# EAGLE board rev1 (EAGLE 6.5.0)
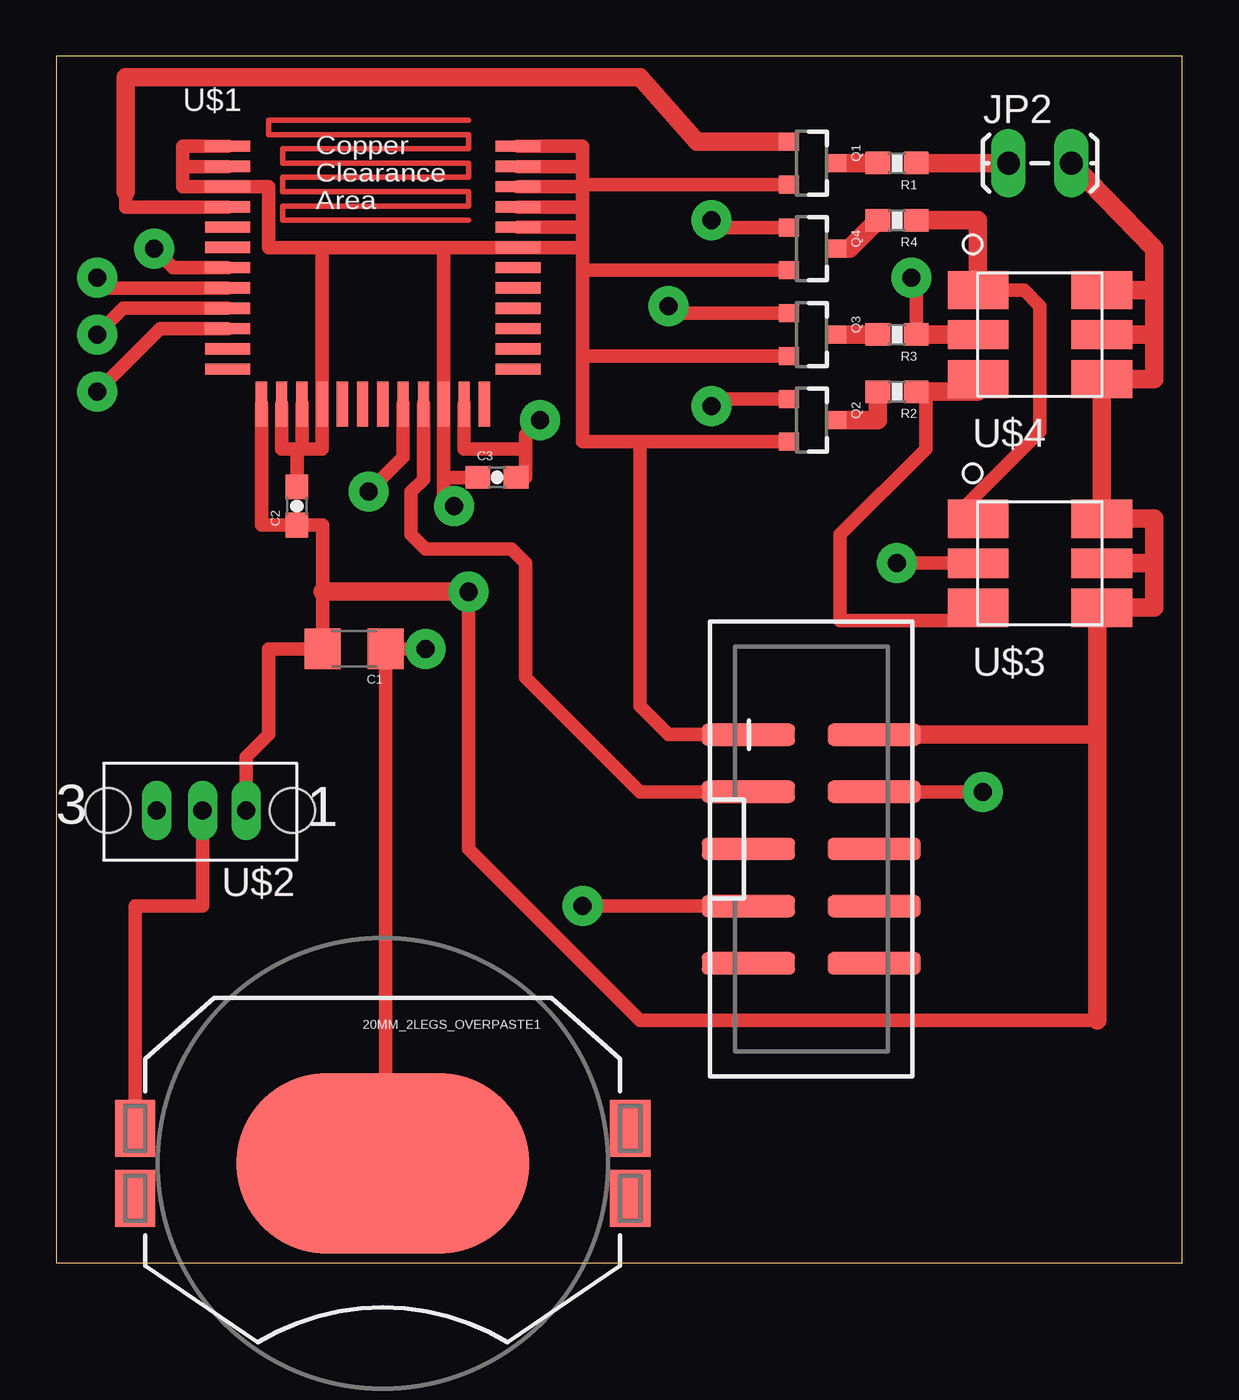
[diagram p0: board, top side]
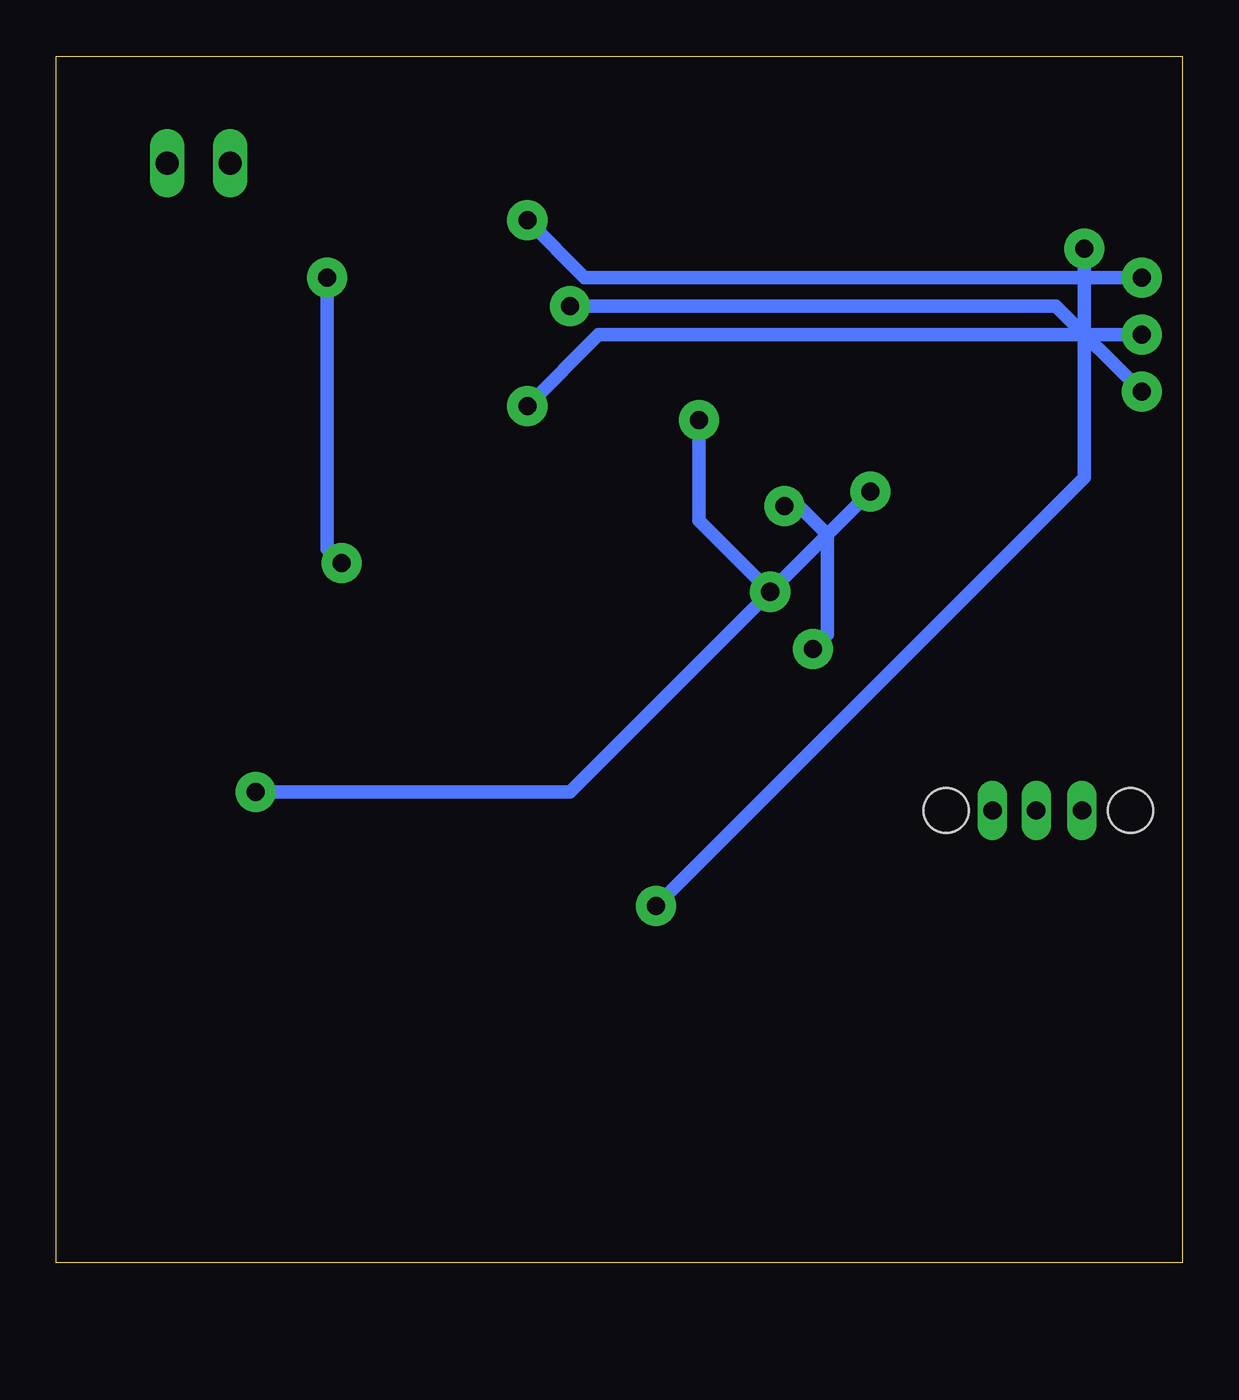
[diagram p1: board, bottom side, seen from below]

Size 50.05 x 53.63 mm. Coordinates in mm from the lower left corner, seen from the top.
Outline: 0,0 50.05,0 50.05,53.63 0,53.63 0,0
Copper layers (1*16): Top 0.035mm / dielectric 1.5mm / Bottom 0.035mm
Design rules "default": minimum track width 10mil, minimum drill 24mil, track to track 8mil, track to pad 8mil, pad to pad 8mil, via to via 8mil, smd to smd 8mil, copper to edge 40mil, drill to drill 8mil, minimum pad ring 10mil, minimum via ring 8mil, stop-mask expansion 4mil, vias tented up to drill 0mil, thermal gap 10mil

## Footprints (pad centres in the part's own frame; a part is rotated, then mirrored left to right if it is on the bottom)
BATTCON_20MM_4LEGS = smd 1.778 x 2.54: 1 -11,1.55; 3 11,1.55; P$1 -11,-1.55; P$2 11,-1.55 | smd 13 x 8: 2 0,0
1206 = smd 1.6 x 1.8: 1 -1.4,0; 2 1.4,0
0603-CAP = smd 1.1 x 1: 1 -0.85,0; 2 0.85,0
2X5-SHROUDED_SMD = smd 4.15 x 1: 1 -2.794,5.08; 2 2.794,5.08; 3 -2.794,2.54; 4 2.794,2.54; 5 -2.794,0; 6 2.794,0; 7 -2.794,-2.54; 8 2.794,-2.54; 9 -2.794,-5.08; 10 2.794,-5.08
1X02_LOCK_LONGPADS = drill 1.016 long: 1 -0.127,0; 2 2.667,0
SOT23-3 = smd 0.8 x 0.9: 1 -0.95,-1; 2 0.95,-1; 3 0,1.1
0603-RES = smd 1.1 x 1: 1 -0.85,0; 2 0.85,0
SF-BLUEGIGA_BLE121LR-A = smd 2 x 0.5: P$1 2,13.45; P$2 2,12.55; P$3 2,11.65; P$4 2,10.75; P$5 2,9.85; P$6 2,8.95; P$7 2,8.05; P$8 2,7.15; P$9 2,6.25; P$10 2,5.35; P$11 2,4.45; P$12 2,3.55; P$25 14.9,3.55; P$26 14.9,4.45; P$27 14.9,5.35; P$28 14.9,6.25; P$29 14.9,7.15; P$30 14.9,8.05; P$31 14.9,8.95; P$32 14.9,9.85; P$33 14.9,10.75; P$34 14.9,11.65; P$35 14.9,12.55; P$36 14.9,13.45 | smd 0.5 x 2: P$13 3.5,2; P$14 4.4,2; P$15 5.3,2; P$16 6.2,2; P$17 7.1,2; P$18 8,2; P$19 8.9,2; P$20 9.8,2; P$21 10.7,2; P$22 11.6,2; P$23 12.5,2; P$24 13.4,2
OS102011 = drill 0.813 long: 1 2.26,2.1; 2 4.2,2.1; 3 6.24,2.1 | hole 2: 0.2,2.1; 8.4,2.1
CREE-RGB-LED = smd 2.7 x 1.7: P$1 -2.75,1.975; P$3 -2.75,-1.975; P$4 2.75,-1.975; P$6 2.75,1.975 | smd 2.7 x 1.3: P$2 -2.75,0; P$5 2.75,0

## Placement (x,y rotation side)
20MM_2LEGS_OVERPASTE1  20mm coincell  [BATTCON_20MM_4LEGS]  14.51,4.43 0 top
C1  [1206]  13.24,27.29 180 top
C2  [0603-CAP]  10.7,33.64 90 top
C3  [0603-CAP]  19.59,34.91 0 top
JP1  M05X2SHD_SMD  [2X5-SHROUDED_SMD]  33.56,18.4 0 top
JP2  M02LOCK_LONGPADS  [1X02_LOCK_LONGPADS]  42.45,48.88 0 top
Q1  MOSFET-NCHANNELBSS138  [SOT23-3]  33.56,48.88 270 top
Q2  MOSFET-NCHANNELBSS138  [SOT23-3]  33.56,37.45 270 top
Q3  MOSFET-NCHANNELBSS138  [SOT23-3]  33.56,41.26 270 top
Q4  MOSFET-NCHANNELBSS138  [SOT23-3]  33.56,45.07 270 top
R1  [0603-RES]  37.37,48.88 180 top
R2  [0603-RES]  37.37,38.72 180 top
R3  [0603-RES]  37.37,41.26 180 top
R4  [0603-RES]  37.37,46.34 180 top
U$1  SF-BLUEGIGA_BLE121LR-A-VISUAL  [SF-BLUEGIGA_BLE121LR-A]  5.62,36.18 0 top
U$2  OS102011  [OS102011]  10.7,22.21 180 top
U$3  CREE-RGB-LED  [CREE-RGB-LED]  43.72,31.1 0 top
U$4  CREE-RGB-LED  [CREE-RGB-LED]  43.72,41.26 0 top

## Library data of the parts
20MM_2LEGS_OVERPASTE1 = bluetipz; PROD_ID: BATT-10373
C1-C3 = SparkFun-Capacitors
JP1 JP2 = SparkFun-Connectors
Q1-Q4 = SparkFun-DiscreteSemi; PROD_ID: TRANS-00830
R1-R4 = SparkFun-Resistors
U$1 U$2 = bluetipz
U$3 U$4 = bike_lo_jack

## Nets
GND: 20MM_2LEGS_OVERPASTE1.2 C1.1 C2.2 C3.1 JP1.1 Q1.2 Q2.2 Q3.2 Q4.2 U$1.P$1 U$1.P$2 U$1.P$3 U$1.P$14 U$1.P$15 U$1.P$16 U$1.P$22 U$1.P$31 U$1.P$32 U$1.P$33 U$1.P$34 U$1.P$35 U$1.P$36
N$1: Q1.3 R1.2
N$2: Q2.3 R2.2
N$3: Q3.3 R3.2
N$4: Q4.3 R4.2
N$5: Q4.1 U$1.P$8
N$6: Q3.1 U$1.P$10
N$7: Q2.1 U$1.P$9
N$8: Q1.1 U$1.P$4
N$9: JP2.1 R1.1
N$10: R2.1 U$3.P$3 U$4.P$3
N$11: R3.1 U$3.P$2 U$4.P$2
N$12: JP1.3 U$1.P$21
N$13: JP1.4 U$1.P$20
N$14: JP1.7 U$1.P$7
N$15: R4.1 U$3.P$1 U$4.P$1
V_BATT: 20MM_2LEGS_OVERPASTE1.1 U$2.2
VDD: C1.2 C2.1 C3.2 JP1.2 JP2.2 U$1.P$13 U$1.P$23 U$2.1 U$3.P$4 U$3.P$5 U$3.P$6 U$4.P$4 U$4.P$5 U$4.P$6

## Tracks (layer width: path | path; a pad name or v marks a point on that pad's centre or on a via)
GND  (via drill 0.8 pad 1.78)
  Top 0.61: U$1.P$36 23.4,49.63 23.4,48.88 | U$1.P$35 23.4,48.73 23.4,48.88 | U$1.P$34 23.4,47.83 | 23.4,47.83 23.4,48.88 | U$1.P$33 23.4,46.93 | 23.4,46.93 23.4,47.61 | 23.4,47.61 23.4,47.83 | U$1.P$32 23.4,46.03 | 23.4,46.03 23.4,46.93 | 23.4,45.13 U$1.P$31 17.22,45.13 | 23.4,45.13 23.4,46.03 | 17.22,45.13 U$1.P$22 17.22,34.91 | U$1.P$15 10.92,36.18 | 10.92,36.18 11.82,36.18 U$1.P$16 11.82,45.13 11.97,45.13 | U$1.P$14 10.02,36.18 10.7,36.18 | 10.7,36.18 10.92,36.18 | U$1.P$2 5.62,48.73 | 5.62,48.73 5.62,48.88 5.62,49.63 U$1.P$1 | 5.62,48.73 5.62,47.83 U$1.P$3 9.43,47.83 9.43,45.7 9.43,45.13 11.97,45.13 | Q1.2 23.4,47.93 23.4,47.61 | Q4.2 23.4,44.12 | 23.4,44.12 23.4,45.13 | Q3.2 23.4,40.31 | 23.4,40.31 23.4,44.12 | Q2.2 25.94,36.5 | 25.94,36.5 23.4,36.5 23.4,39.99 23.4,40.31 | C2.2 10.7,36.18 | 17.22,34.91 C3.1 | 20MM_2LEGS_OVERPASTE1.2 14.64,4.43 C1.1 v16.41,27.29 | 11.97,45.13 17.22,45.13 | v17.68,33.64 17.22,34.1 17.22,34.91 | JP1.1 27.21,23.48 25.94,24.75 25.94,36.5
  Bottom 0.61: v16.41,27.29 15.78,27.93 15.78,32.37 17.05,33.64 v17.68,33.64
N$1
  Top 0.813: Q1.3 R1.2
N$2
  Top 0.813: R2.2 36.52,37.45 Q2.3
N$3
  Top 0.813: Q3.3 R3.2
N$4
  Top 0.813: Q4.3 35.25,45.07 R4.2
N$5  (via drill 0.8 pad 1.78)
  Top 0.61: v29.11,46.34 29.11,46.02 Q4.1 | U$1.P$8 1.81,43.33 v1.81,43.8
  Bottom 0.61: v29.11,46.34 26.57,43.8 v1.81,43.8
N$6  (via drill 0.8 pad 1.78)
  Top 0.61: U$1.P$10 4.62,41.53 v1.81,38.72 | v27.21,42.53 27.53,42.21 Q3.1
  Bottom 0.61: v1.81,38.72 5.62,42.53 v27.21,42.53
N$7  (via drill 0.8 pad 1.78)
  Top 0.61: v29.11,38.09 29.11,38.4 Q2.1 | U$1.P$9 2.98,42.43 v1.81,41.26
  Bottom 0.61: v29.11,38.09 25.94,41.26 v1.81,41.26
N$8
  Top 0.61: 3.08,47.61 3.08,46.93 U$1.P$4
  Top 0.813: Q1.1 28.48,49.83 25.94,52.69 3.08,52.69 3.08,47.61
N$9
  Top 0.813: R1.1 JP2.1
N$10
  Top 0.61: U$3.P$3 40.41,28.56 37.37,28.56 34.83,28.56 34.83,32.37 38.64,36.18 38.64,38.3 R2.1
  Top 0.813: R2.1 40.97,38.72 U$4.P$3
N$11  (via drill 0.8 pad 1.78)
  Top 0.61: U$3.P$2 v37.37,31.1 | v38.01,43.8 38.22,43.59 R3.1
  Top 0.813: R3.1 U$4.P$2
  Bottom 0.61: v37.37,31.1 38.01,31.73 v38.01,43.8
N$12
  Top 0.61: JP1.3 25.94,20.94 20.86,26.02 20.86,31.1 20.23,31.73 17.05,31.73 16.41,31.73 15.78,32.37 15.78,34.27 16.32,34.81 U$1.P$21
N$13  (via drill 0.8 pad 1.78)
  Top 0.61: U$1.P$20 15.42,35.82 v13.88,34.27 | v41.18,20.94 JP1.4
  Bottom 0.61: v13.88,34.27 27.21,20.94 v41.18,20.94
N$14  (via drill 0.8 pad 1.78)
  Top 0.61: U$1.P$7 5.19,44.23 v4.35,45.07 | v23.4,15.86 JP1.7
  Bottom 0.61: v4.35,45.07 4.35,34.91 v23.4,15.86
N$15
  Top 0.61: U$3.P$1 40.41,33.64 43.72,36.95 43.72,42.53 43.02,43.23 U$4.P$1
  Top 0.813: R4.1 40.97,46.34 U$4.P$1
N$16
  Top 0.254: 18.32,46.34 10.06,46.34 10.06,46.98 18.32,46.98 18.32,47.61 10.06,47.61 10.06,48.24 18.32,48.24 18.32,48.88 10.06,48.88 10.06,49.52 18.32,49.52 18.32,50.15 9.43,50.15 9.43,50.78 18.32,50.78
V_BATT
  Top 0.61: 20MM_2LEGS_OVERPASTE1.1 3.51,15.86 5.62,15.86 6.5,15.86 U$2.2
VDD  (via drill 0.8 pad 1.78)
  Top 0.406: 48.8,41.26 U$4.P$5 | U$3.P$4 46.26,29.12 | 37.37,23.48 JP1.2
  Top 0.61: U$2.1 8.44,22.49 9.43,23.48 9.43,27.29 C1.2 11.84,29.83 11.84,32.79 C2.1 9.12,32.79 U$1.P$13 | U$1.P$23 18.12,36.18 20.86,36.18 | 20.86,36.18 20.86,34.91 C3.2 | v21.5,37.45 20.86,36.81 20.86,36.18 | 46.26,10.78 25.94,10.78 18.32,18.4 v18.32,29.83
  Top 0.813: U$4.P$6 48.8,43.23 | 48.8,43.23 48.8,41.26 | U$4.P$5 48.8,41.26 | 48.8,41.26 48.8,39.99 48.8,39.28 U$4.P$4 U$3.P$6 48.8,33.08 48.8,31.1 | 48.8,31.1 U$3.P$5 | U$3.P$4 48.8,29.12 48.8,31.1 | 46.26,29.12 46.26,23.48 | 46.26,23.48 37.37,23.48 | JP2.2 48.8,45.07 48.8,43.23 | JP1.2 46.26,23.48 | 46.26,23.48 46.26,10.78 | v18.32,29.83 11.84,29.83
  Bottom 0.61: v18.32,29.83 21.5,33.01 v21.5,37.45